# Altium PCB EX384.PcbDoc (part 2 of 2)
Units mil, origin at the board's own origin, x right, y up, seen from the top; angles counter-clockwise.
Board outline 2480 x 4575 mil, 2 copper layers (Top Layer, Bottom Layer), stack 64.8 mil thick; 53 components, 56 nets, 194 pads, 19 vias.
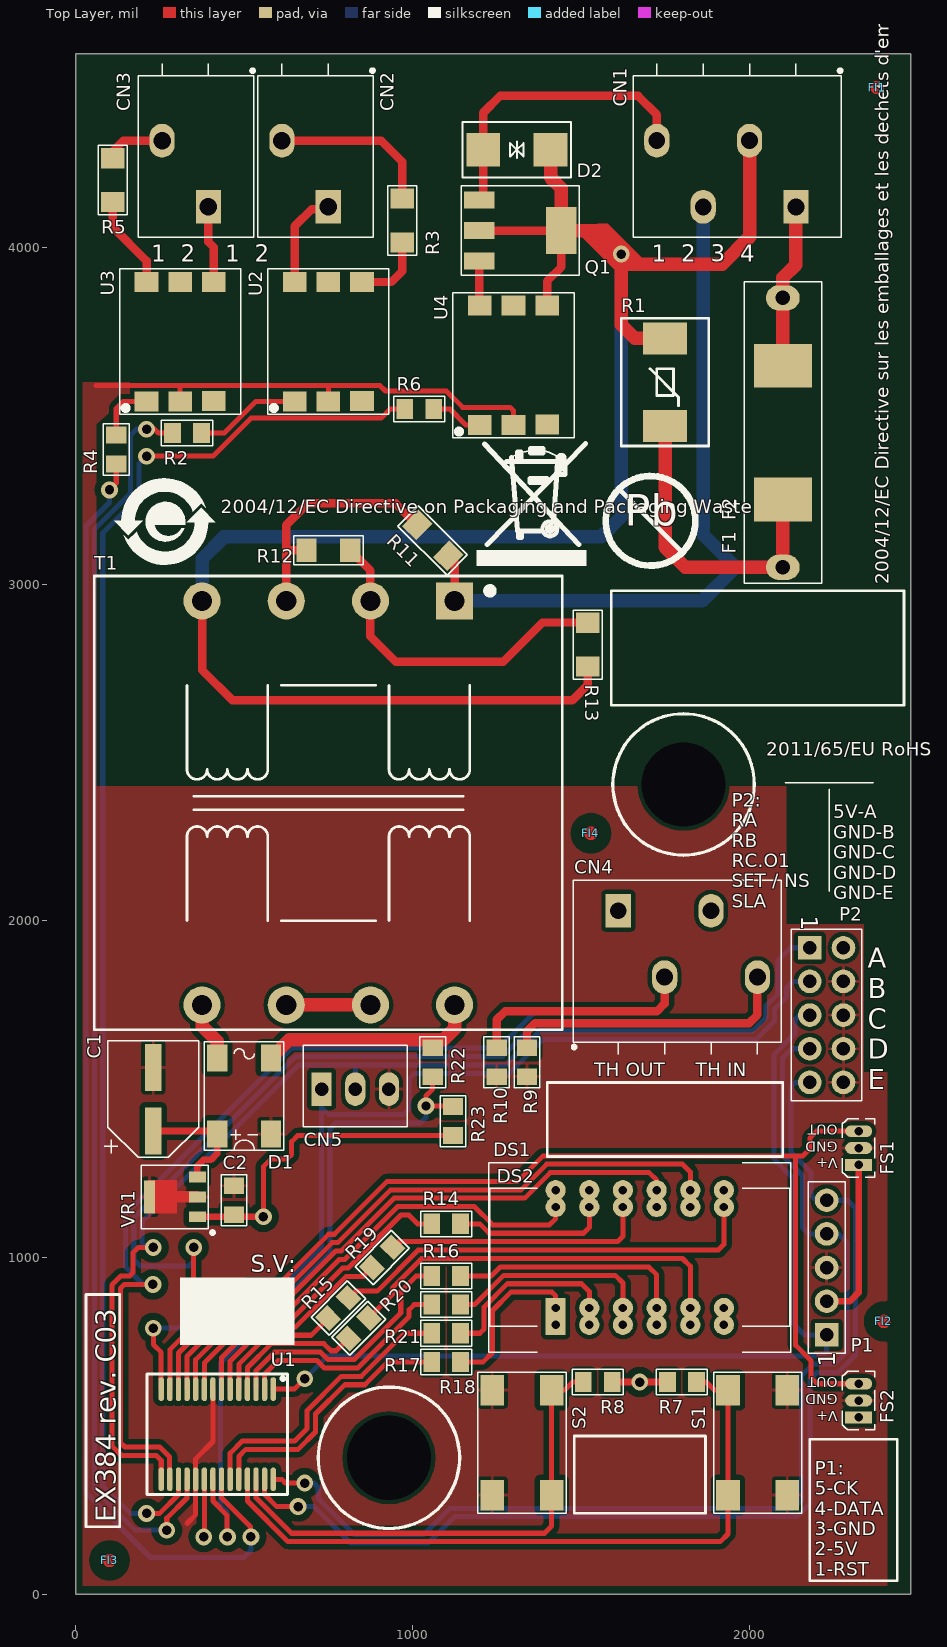
[diagram p0: Top Layer view]

## Silkscreen, mask and mechanical layers (free items; w line width, h text height) (continued)
FAB-NOTES: (continued)
  text "Notes: (unless otherwise specified). / 1 - Vendor to manufacture boards per this drawing using the tooling provided per IPC 6012 class 2. Boards to be manufactured in accordance with UL-94V0 and shall be marked with the vendor's logo, flame and date code, on the top solder side, in one of the three empty placeholder rectangles. Labeling needs to be compliant with IPC-1066. / 2 - The gerber files must be cross referenced to the provided test data (in IPC-D-356 format) prior to tooling this job for fabrication. All known discrepancies are documented in the test file. If additional discrepancies are found, contact customer prior to proceeding. / 3 - Material RoHS compliant: Tetra - or multi-functional FR-4 laminates and prepregs per IPC-4101. Minimum glass transition temperatures (Tg) of 140 degrees C and minimum decomposition temperatures (Td) of 330 degrees C required. 1/1 oz copper. / 4 - Tolerances: .XXX = +/- 0.005 inches, .XX = +/- 0.01 inches unless otherwise specified. / 5 - Finished overall board thickness to be .062 inches +/- 10 percent. / 6 - All hole sizes are after plating. All hole sizes are +/- .003 inches unless otherwise specified. All plated through holes shall have a minimum copper barrel thickness of .001 inches. / 7 - All boards to be finished with RoHS compliant lead-free surface finish. Example: Lead-Free HASL. / 8 - Minimum annular ring to be .002 inches. / 9 - Liquid photoimageable soldermask over bare copper on both sides of the board. Soldermask registration to be within +/- .002 inches of its respective circuit layer and there is to be no mask on any pad area or in any hole. Soldermask designed to partially overlay via pads. / 10 - Silkscreen using white non-conductive ink after soldermask is applied. There is to be no silkscreen on any pad area or in any hole. / 11 - Warp and twist shall not exceed 1-1/2 percent of the greatest diagonal of the board." at 4155,-10 h100

## Dimensions
2480,0 to 2390,810 on DIMENSION
2480,4575 to 2380,4465 on DIMENSION
2410,810 to 1540,2260 on DIMENSION
1520,2260 to 2370,4475 on DIMENSION
1325,450 to 2025,430 on DIMENSION
0,4575 to 0,0 on DIMENSION
0,4575 to 2480,4575 on DIMENSION
1805,2405 to 930,405 on DIMENSION
930,405 to 1805,2405 on DIMENSION
0,4575 to 930,405 on DIMENSION

## Text inside footprints (layer, text, board x,y; h text height)
FS1: Top Overlay "OUT" at 2263,1394 h30 r180; Top Overlay "GND" at 2263,1344 h30 r180; Top Overlay "V+" at 2263,1294 h30 r180; Bottom Overlay "V+" at 2183,1294 h30 r180; Bottom Overlay "GND" at 2183,1344 h30 r180; Bottom Overlay "OUT" at 2183,1394 h30 r180
FS2: Top Overlay "OUT" at 2263,644 h30 r180; Top Overlay "GND" at 2263,594 h30 r180; Top Overlay "V+" at 2263,544 h30 r180; Bottom Overlay "V+" at 2183,544 h30 r180; Bottom Overlay "GND" at 2183,594 h30 r180; Bottom Overlay "OUT" at 2183,644 h30 r180
P1: Top Overlay "1" at 2255,675 h50 r90
P2: Top Overlay "1" at 2155,2015 h50 r270
R1: Mechanical 27 "MOV" at 1871.7,3635 h50 r90; Mechanical 26 "2" at 1760,3730 h25 r90; Mechanical 26 "1" at 1760,3470 h25 r90